# Altium PCB XT short bus with break-away tab ( 5.2 X 4.2 inches).PCBDOC
Units mil, origin at the board's own origin, x right, y up, seen from the top; angles counter-clockwise.
Board outline 5200 x 4950 mil, 10 copper layers (TopLayer, MidLayer1, MidLayer2, MidLayer3, MidLayer4, MidLayer5, MidLayer6, MidLayer7, MidLayer8, BottomLayer); 1 components, 0 nets, 85 pads, 0 vias.
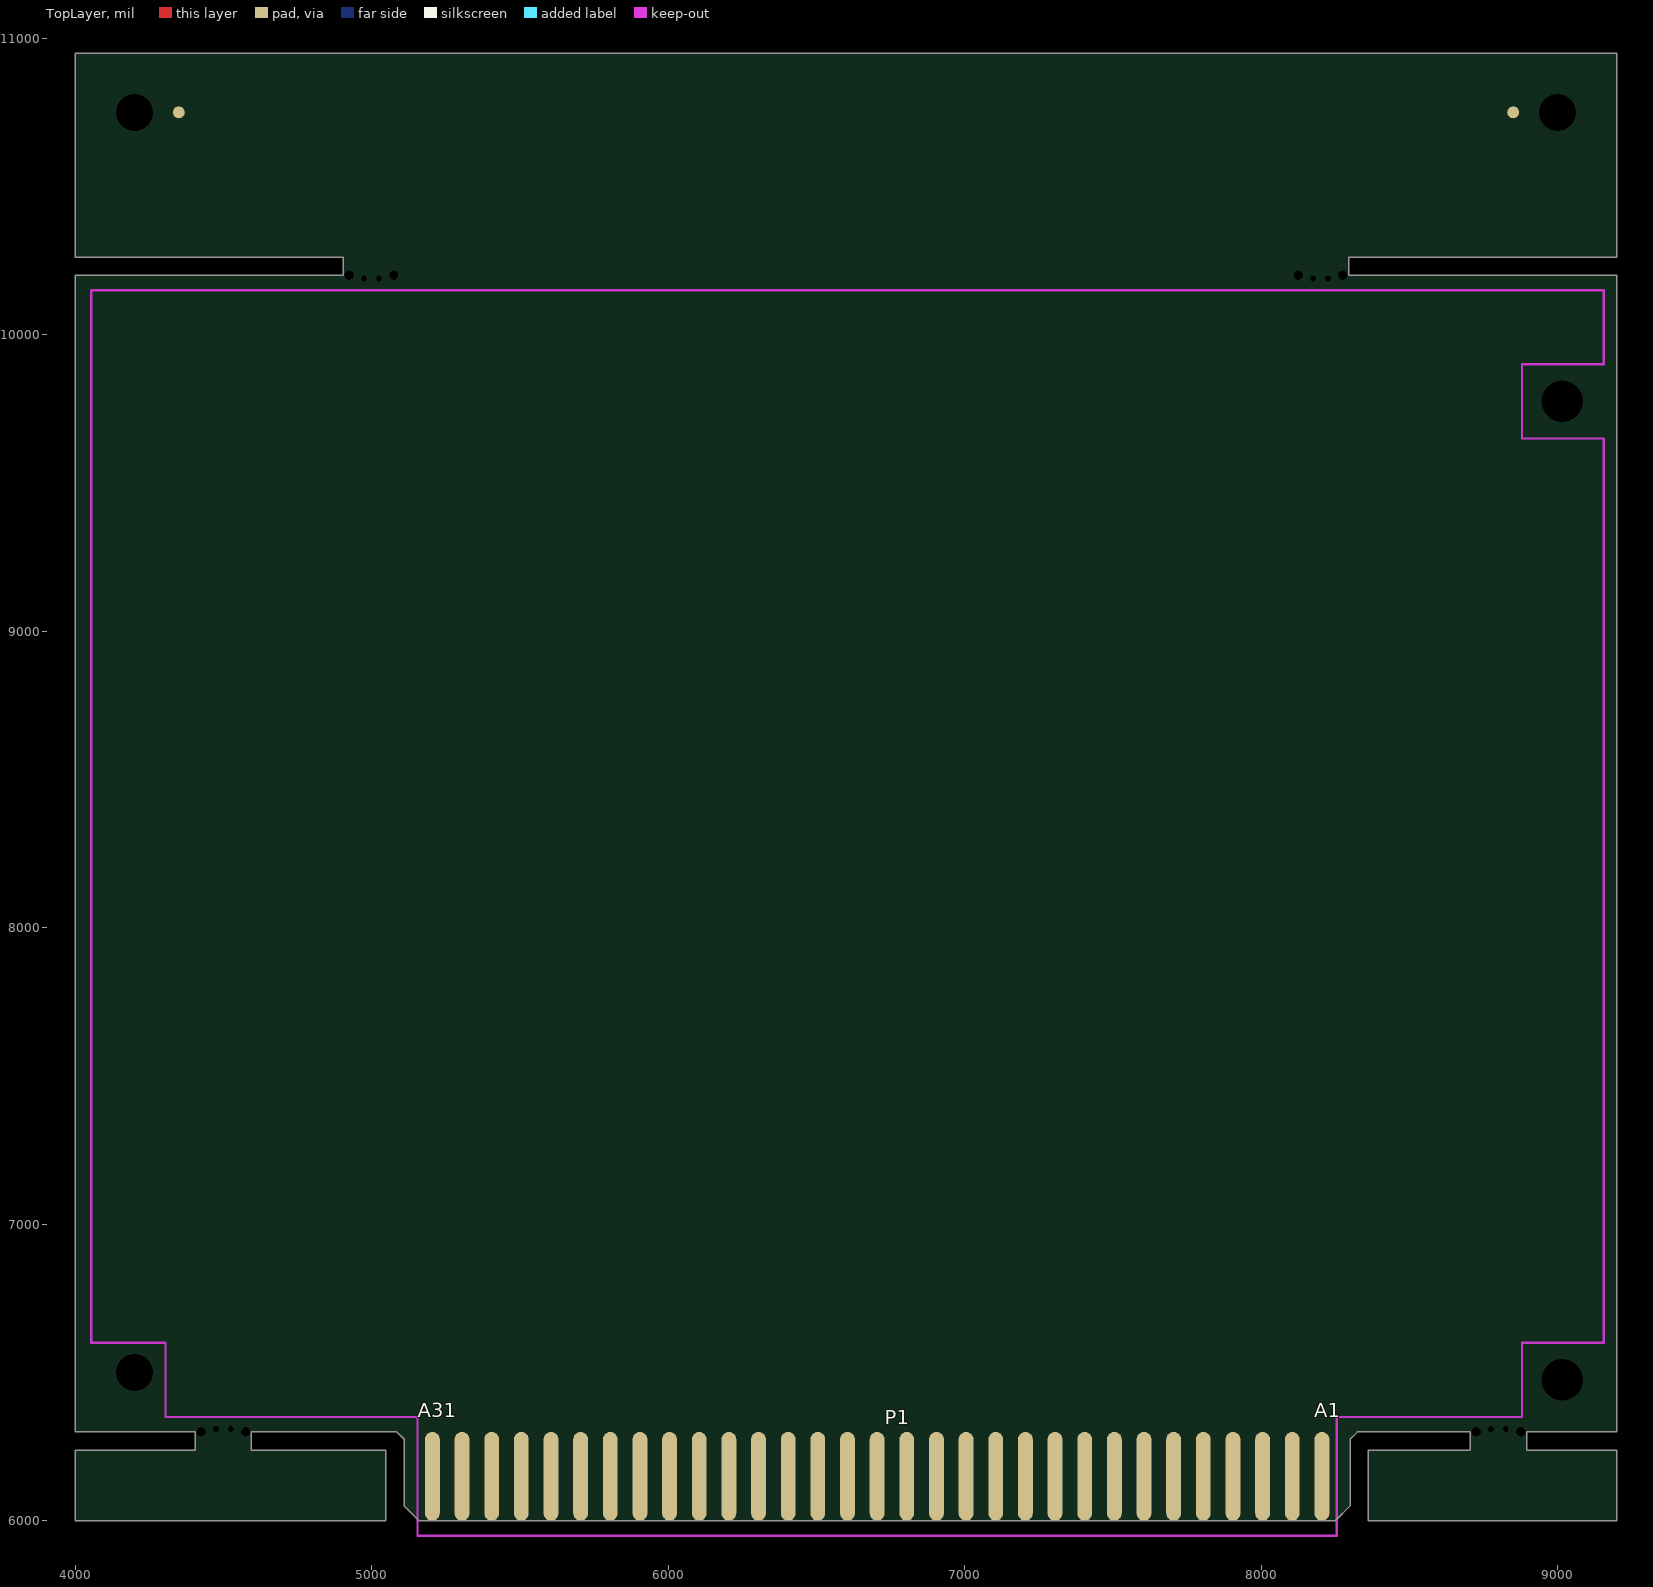
[diagram p0: TopLayer view]
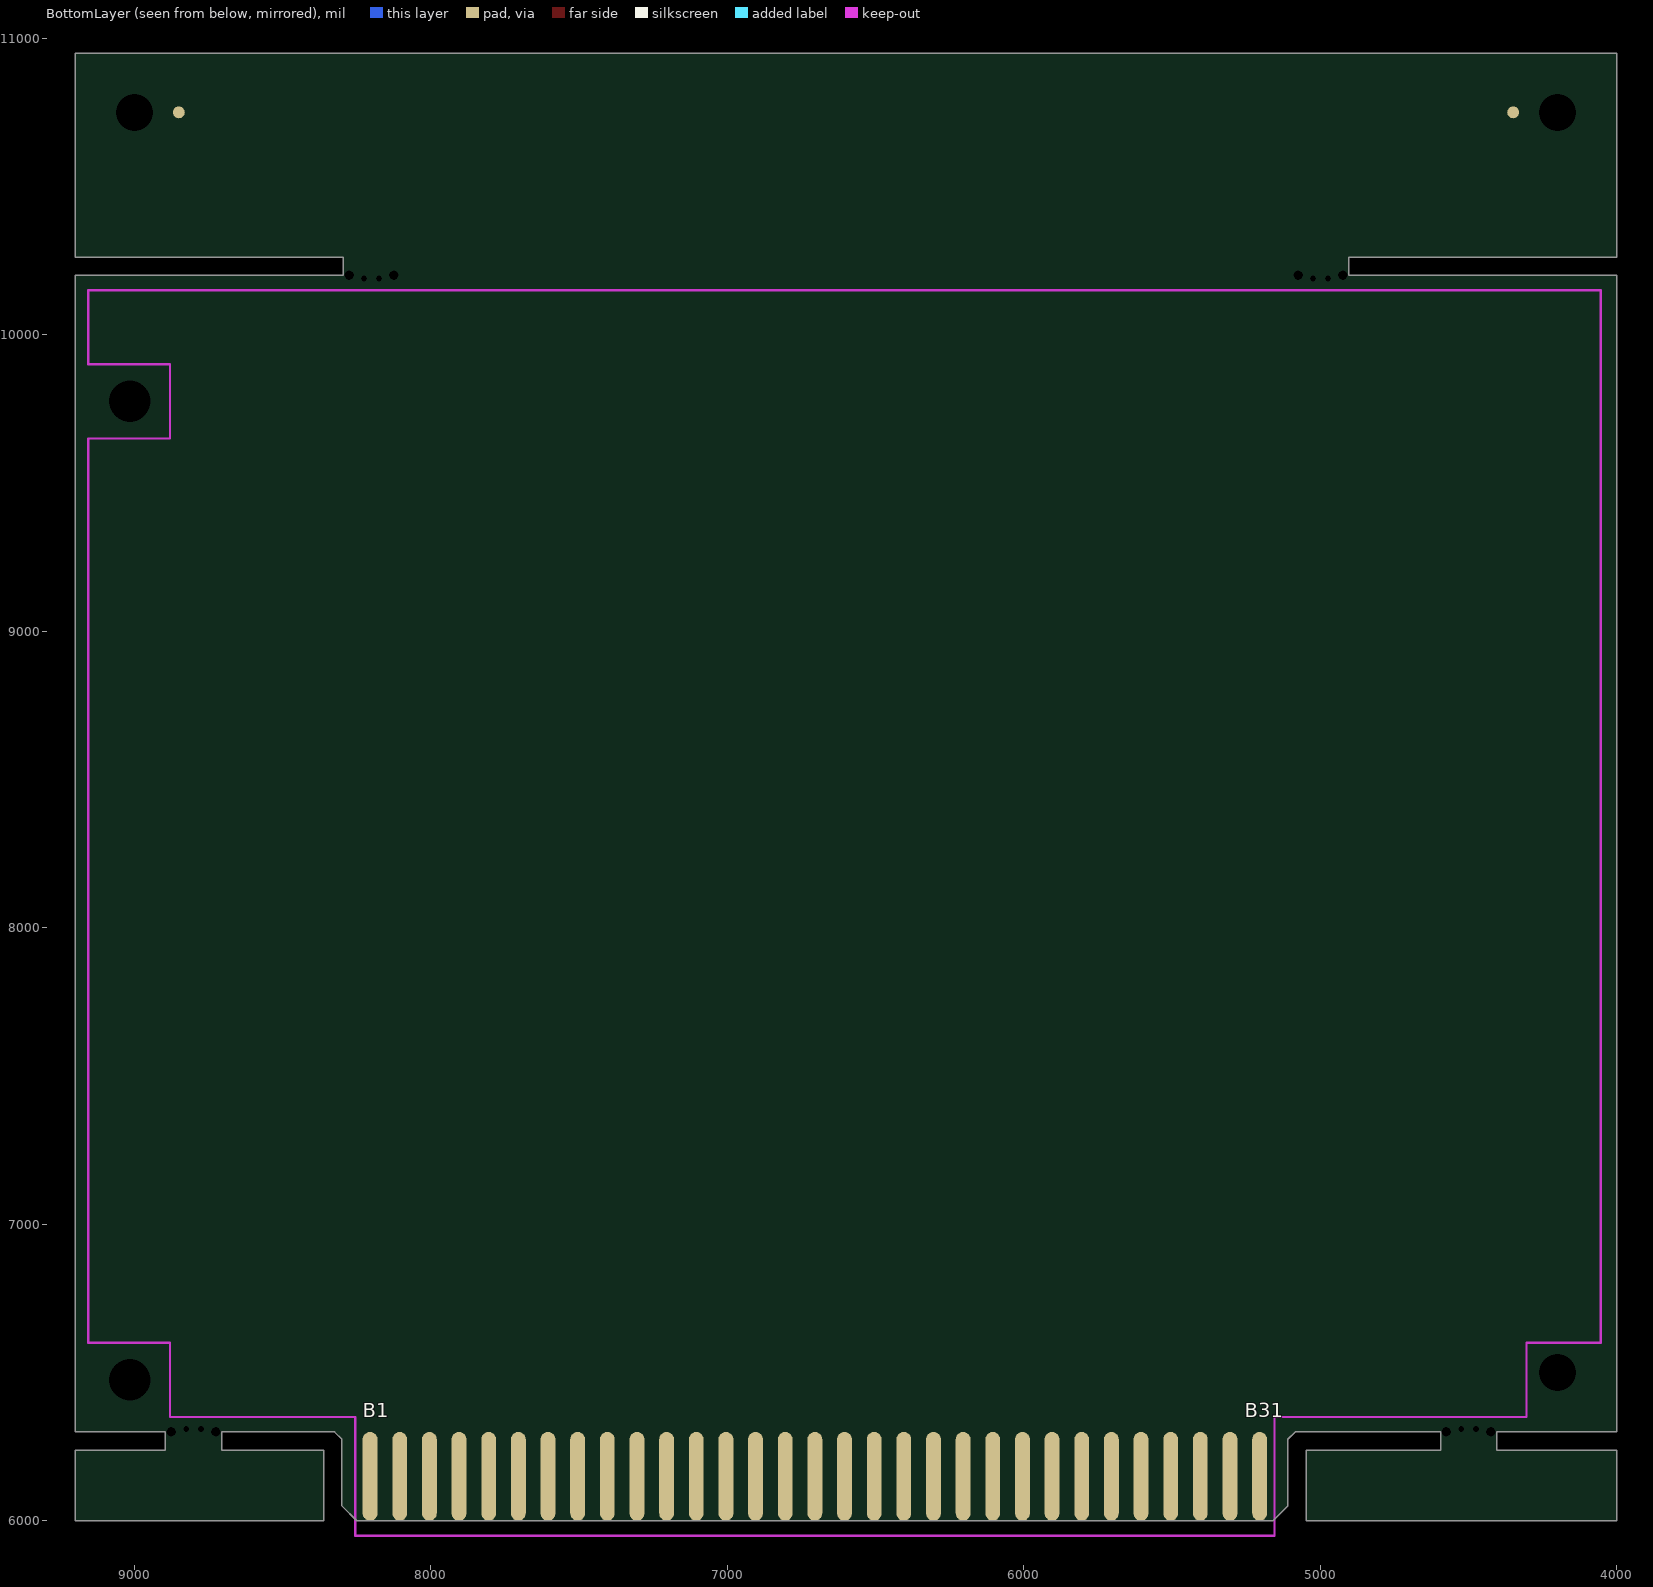
[diagram p1: BottomLayer view, seen from below]
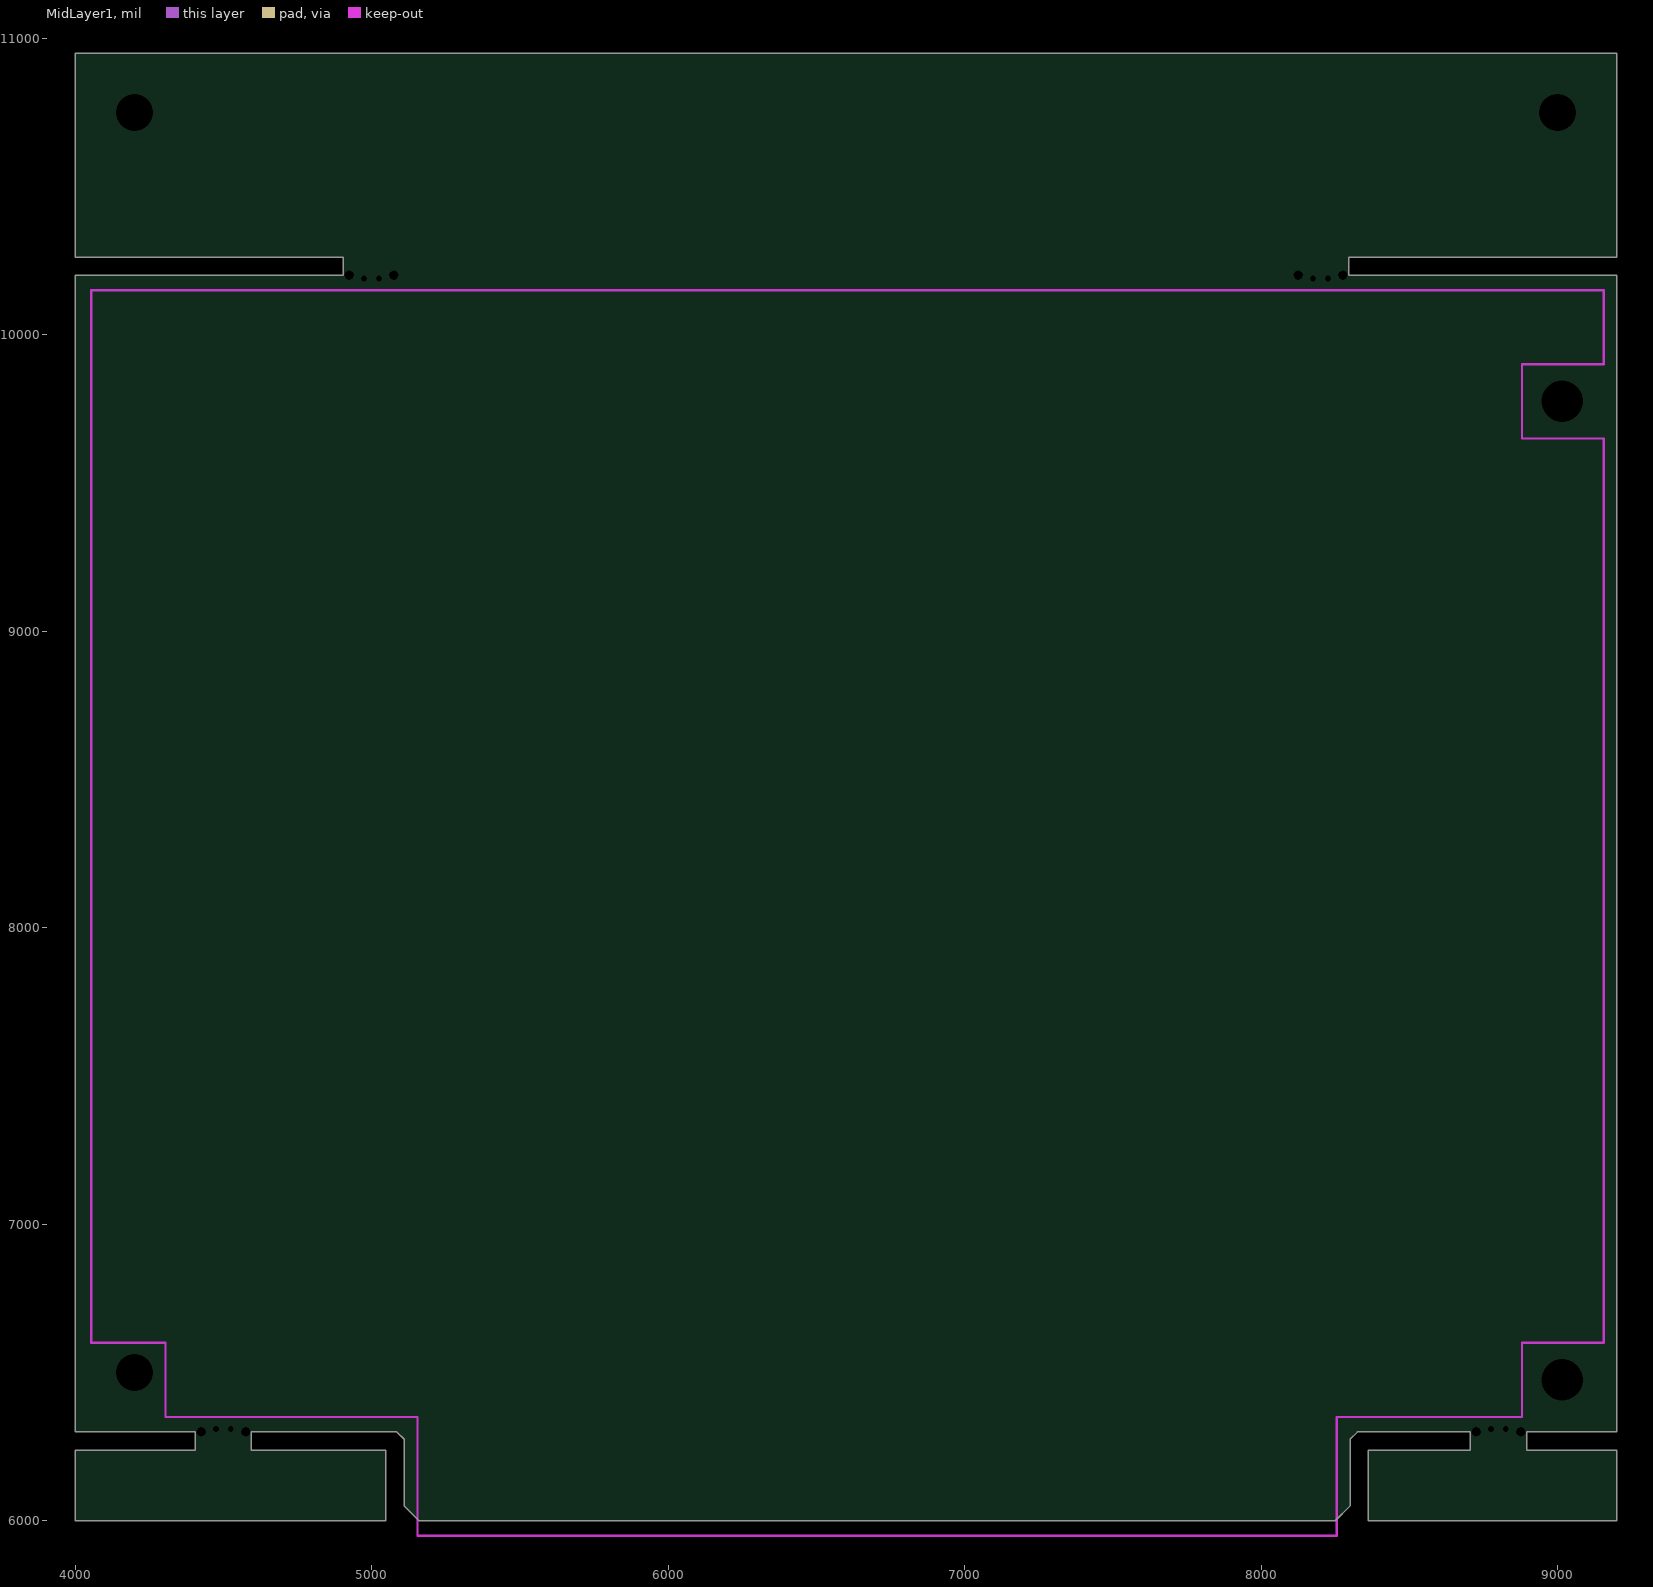
[diagram p2: MidLayer1]
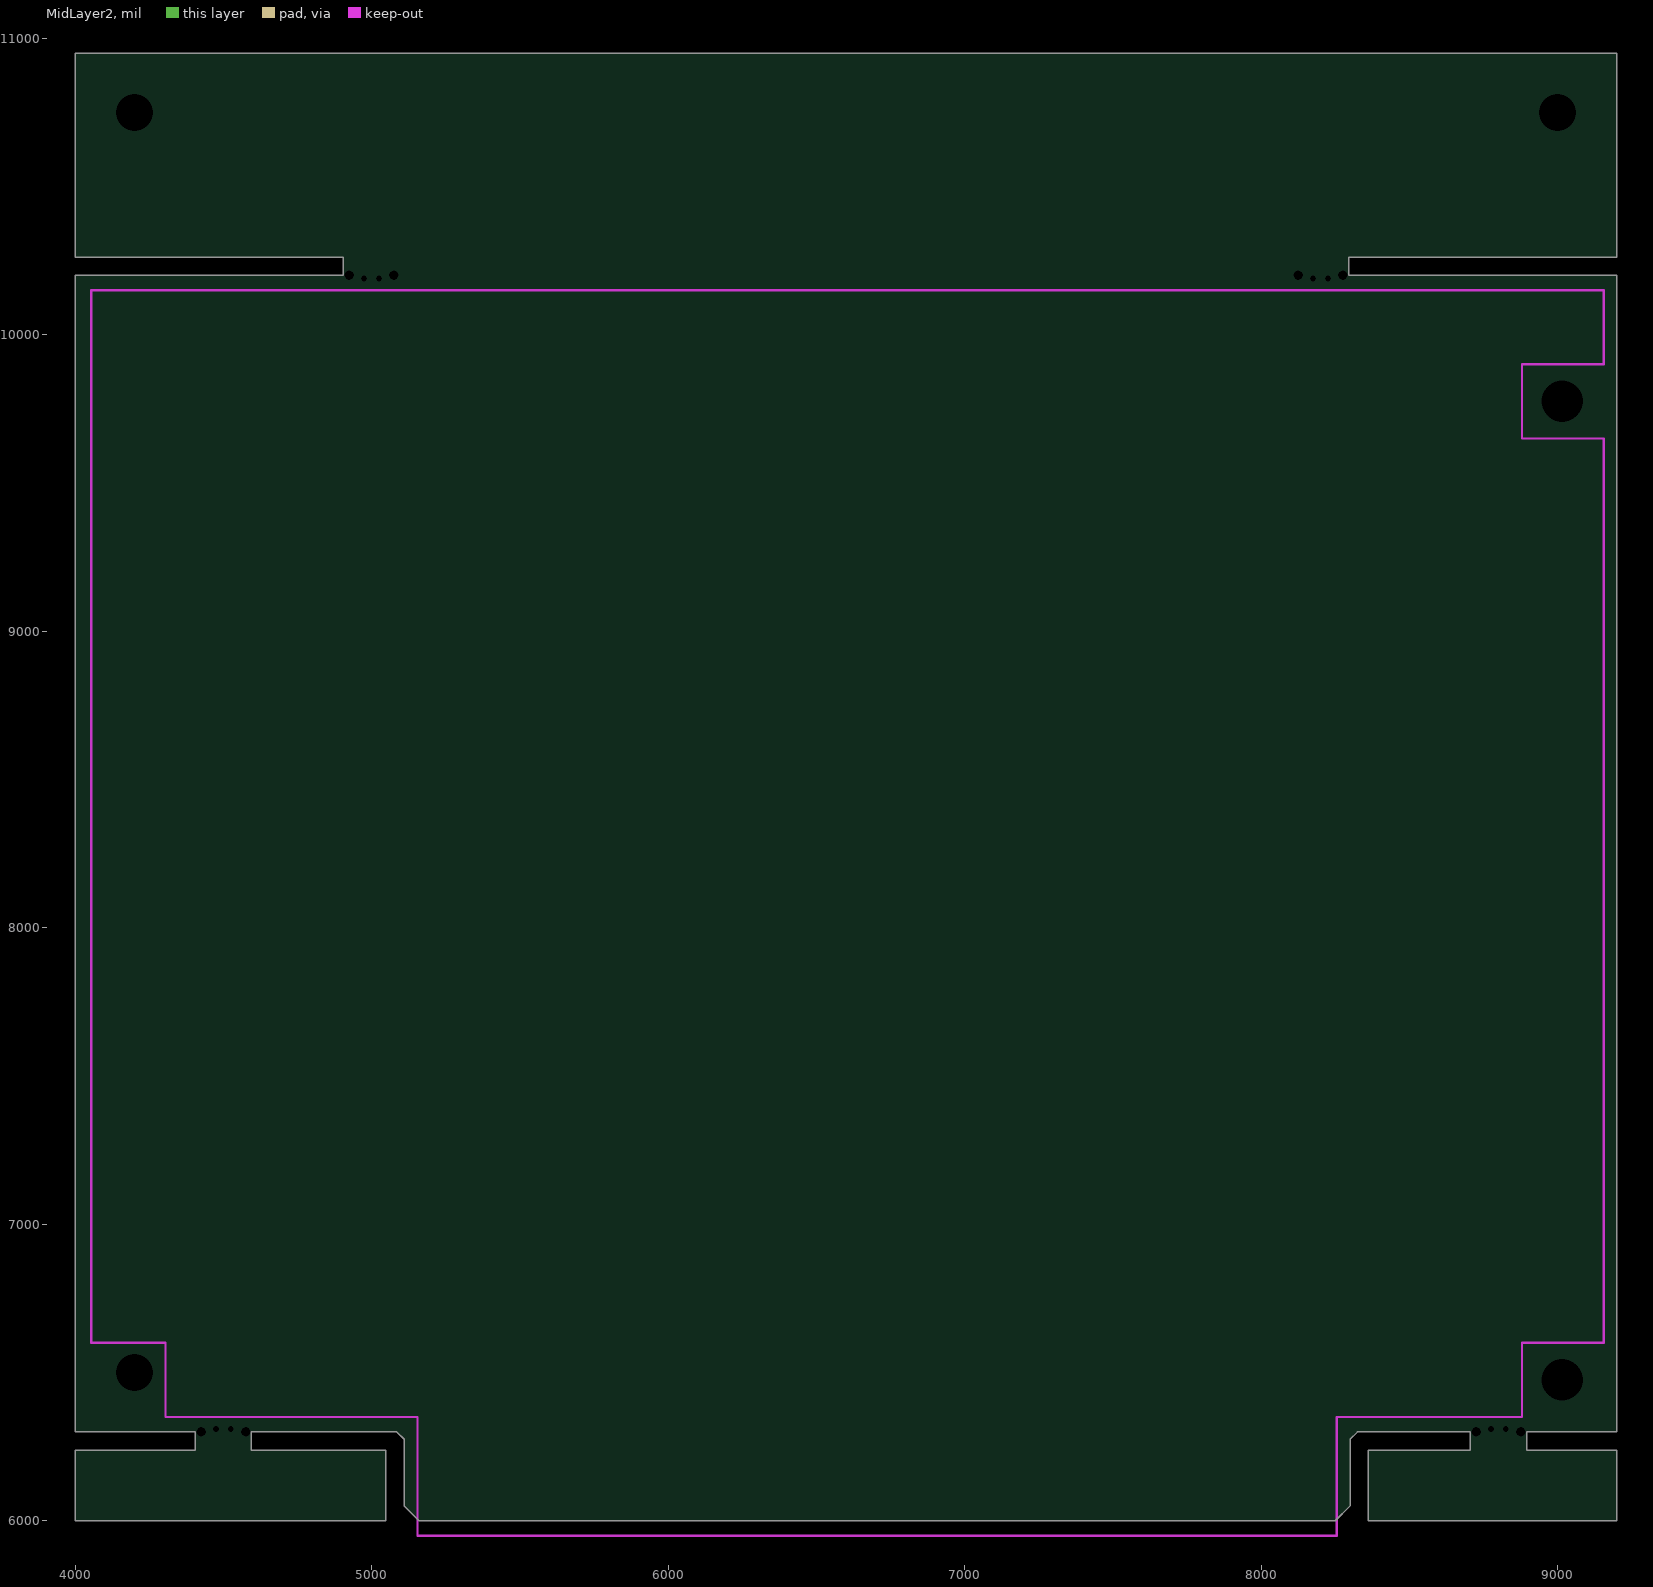
[diagram p3: MidLayer2]
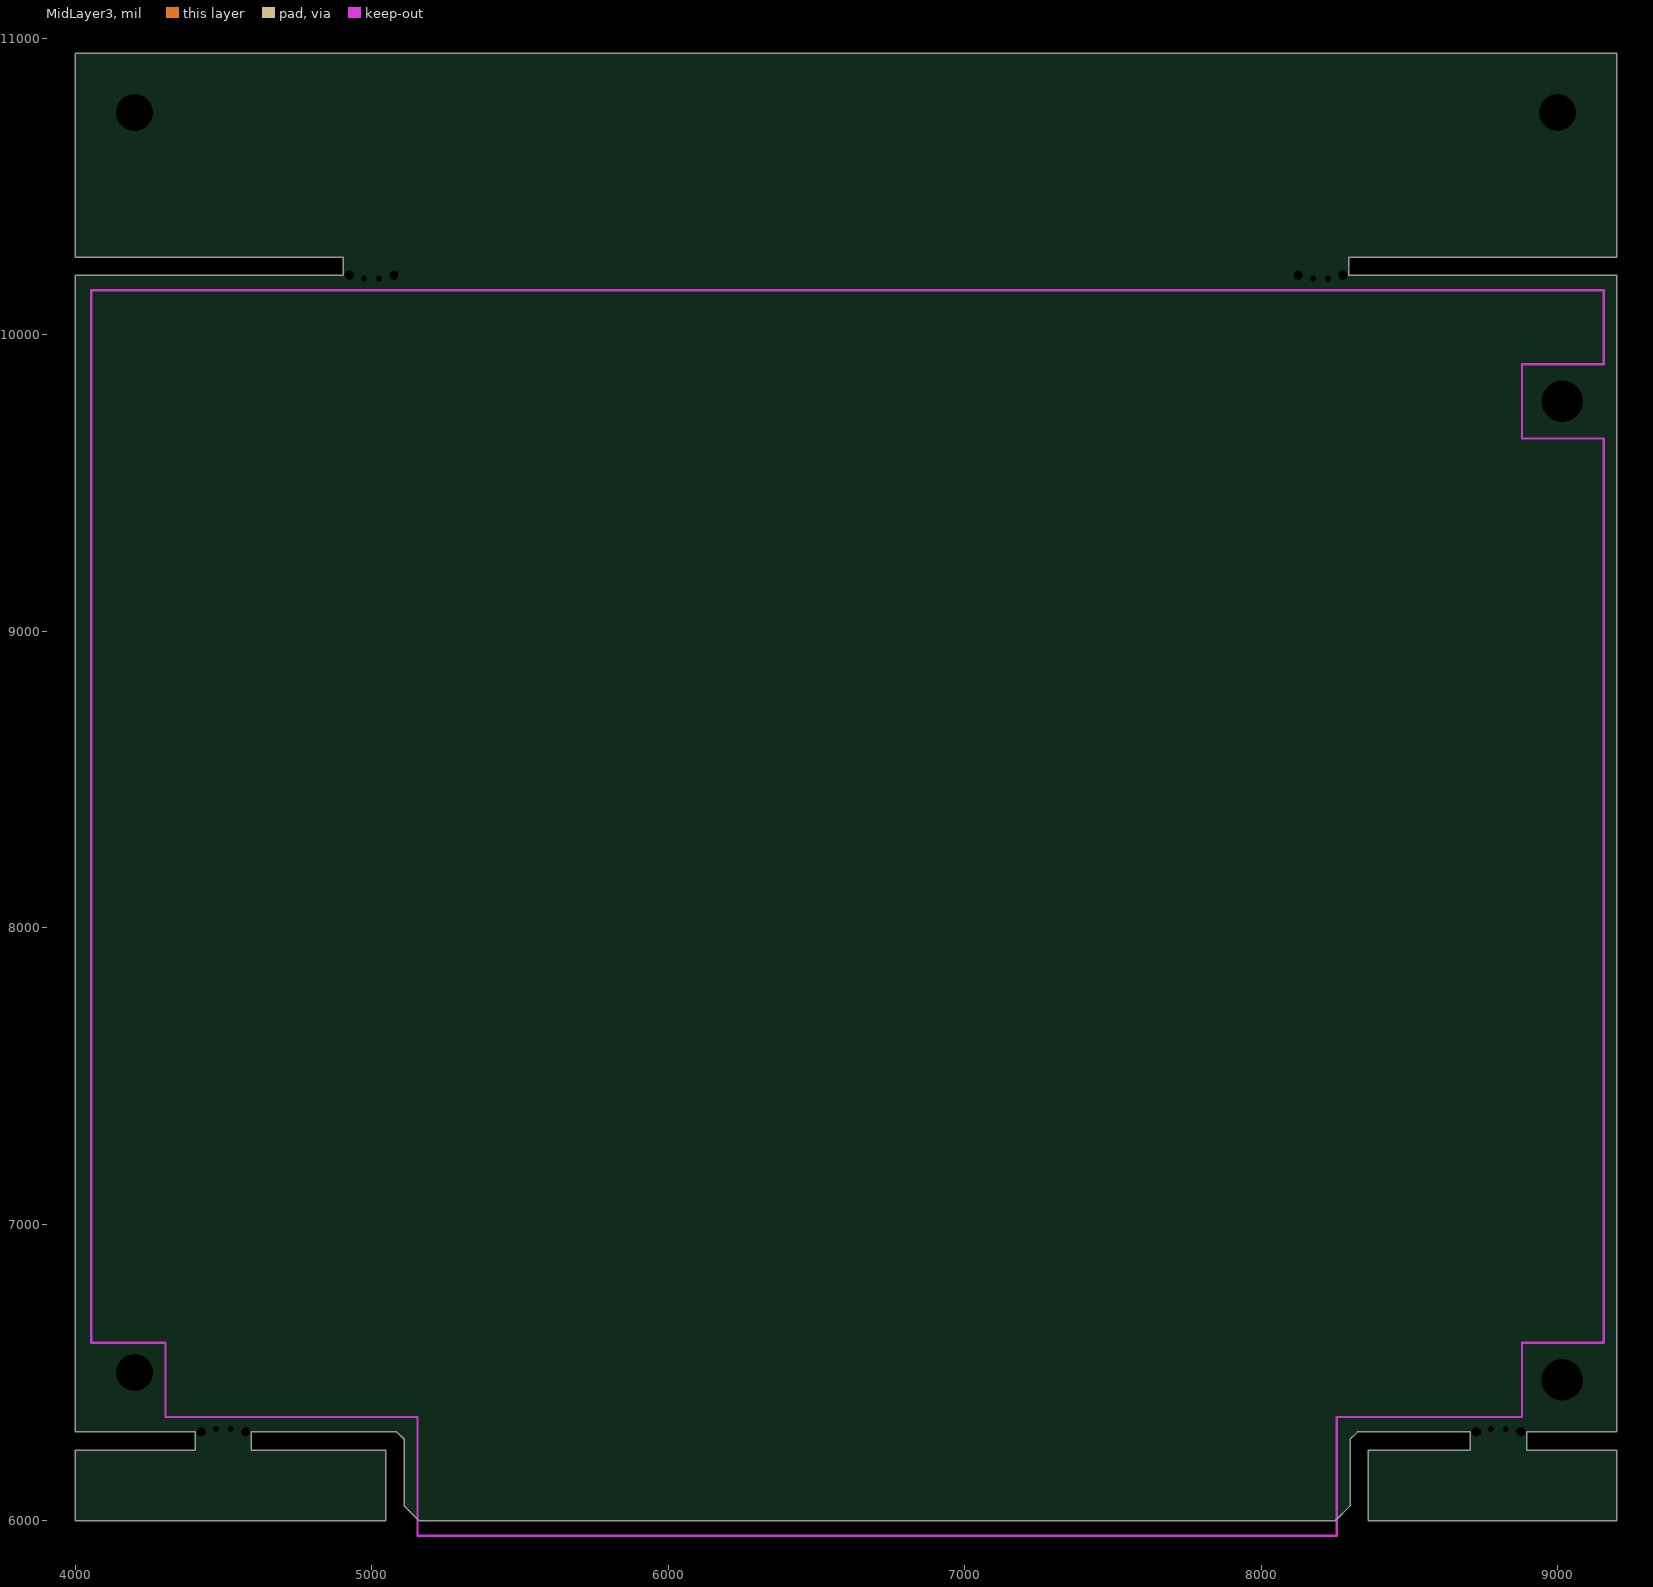
[diagram p4: MidLayer3]
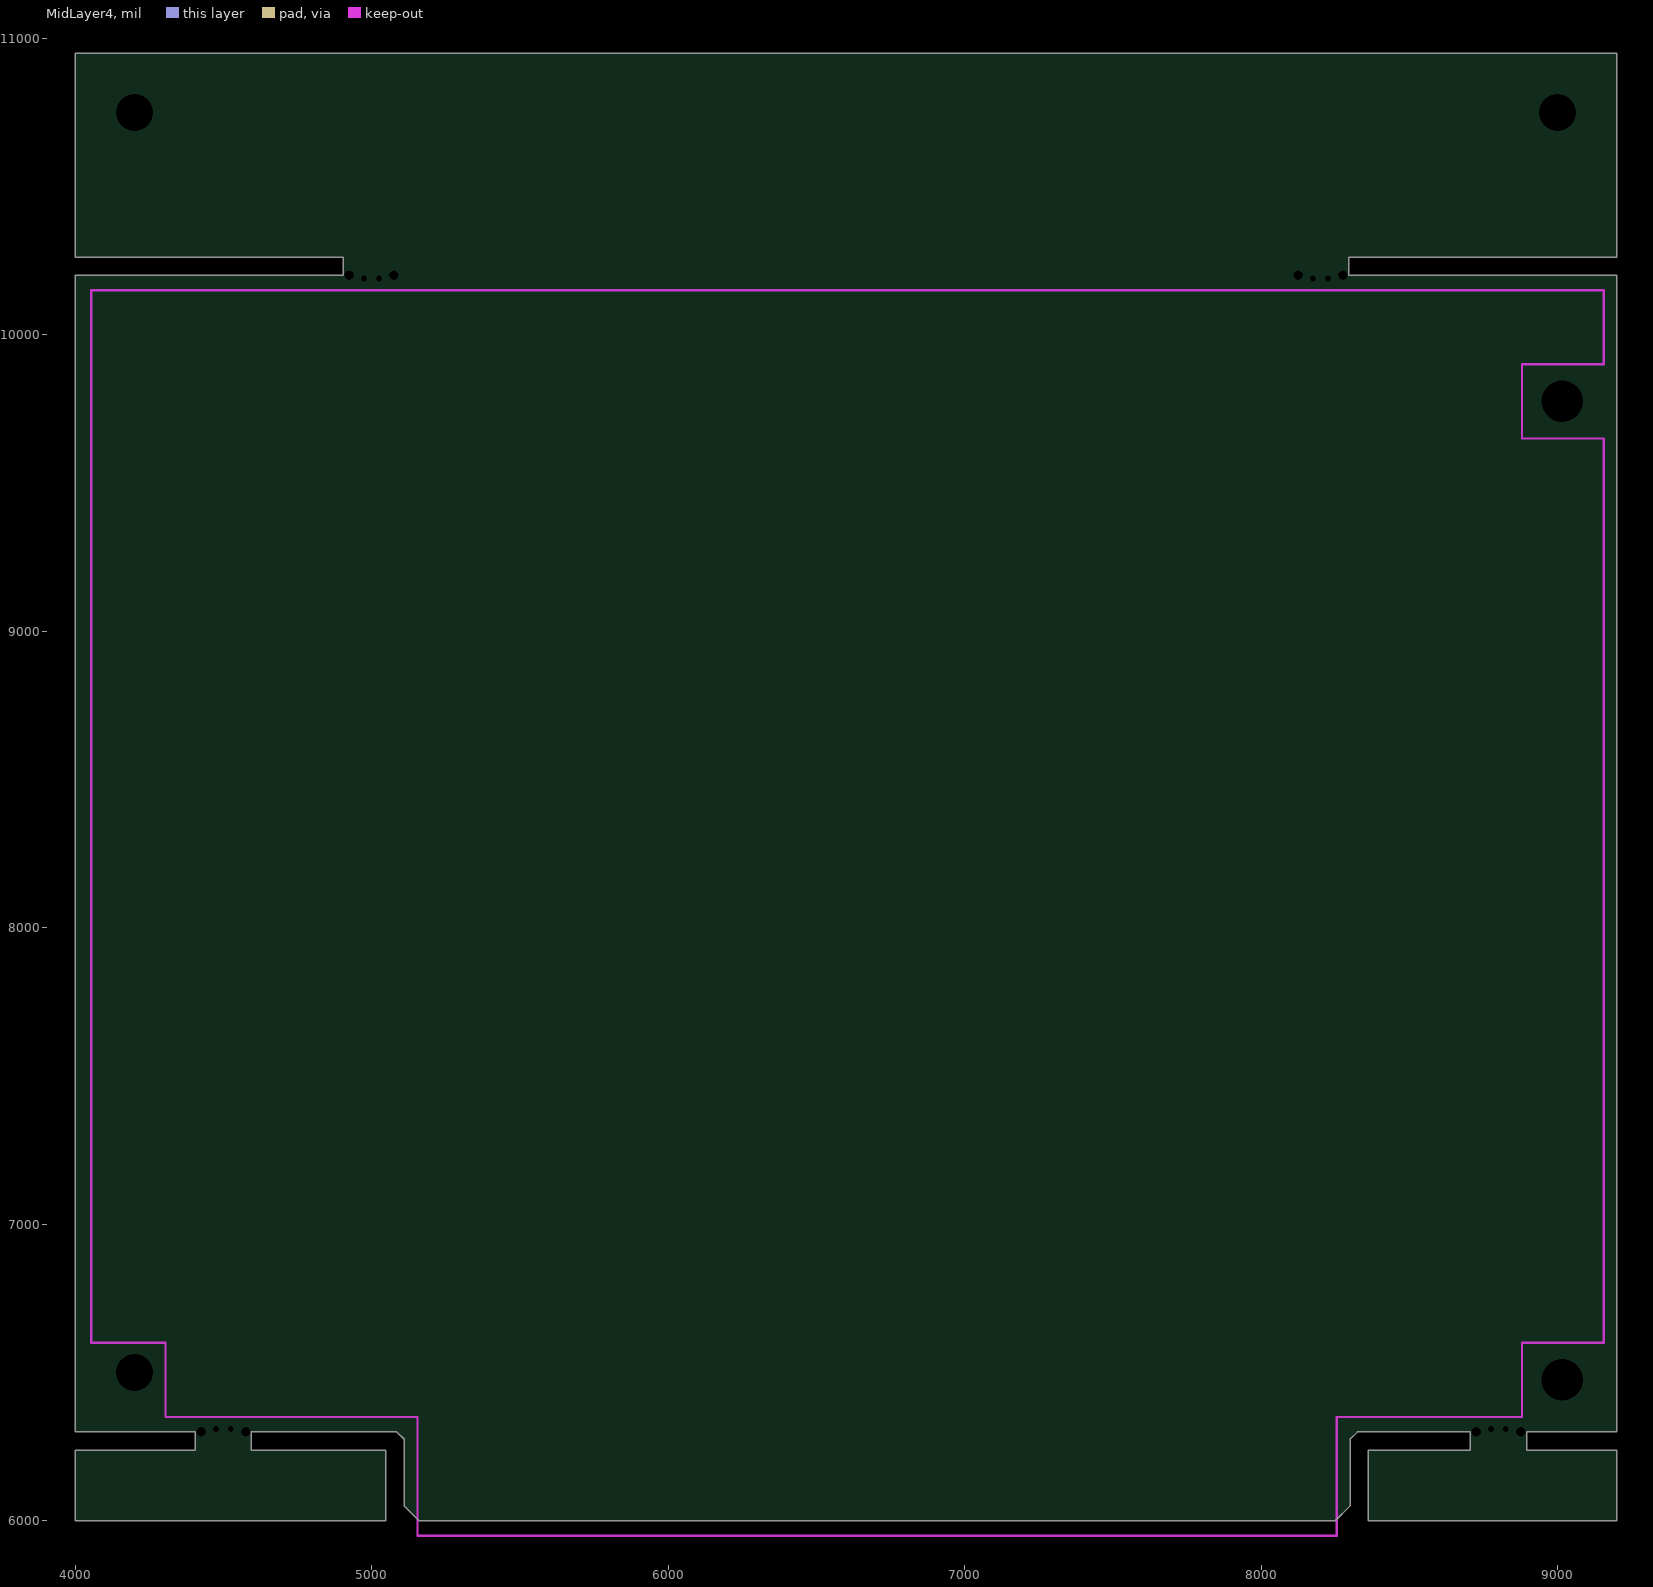
[diagram p5: MidLayer4]
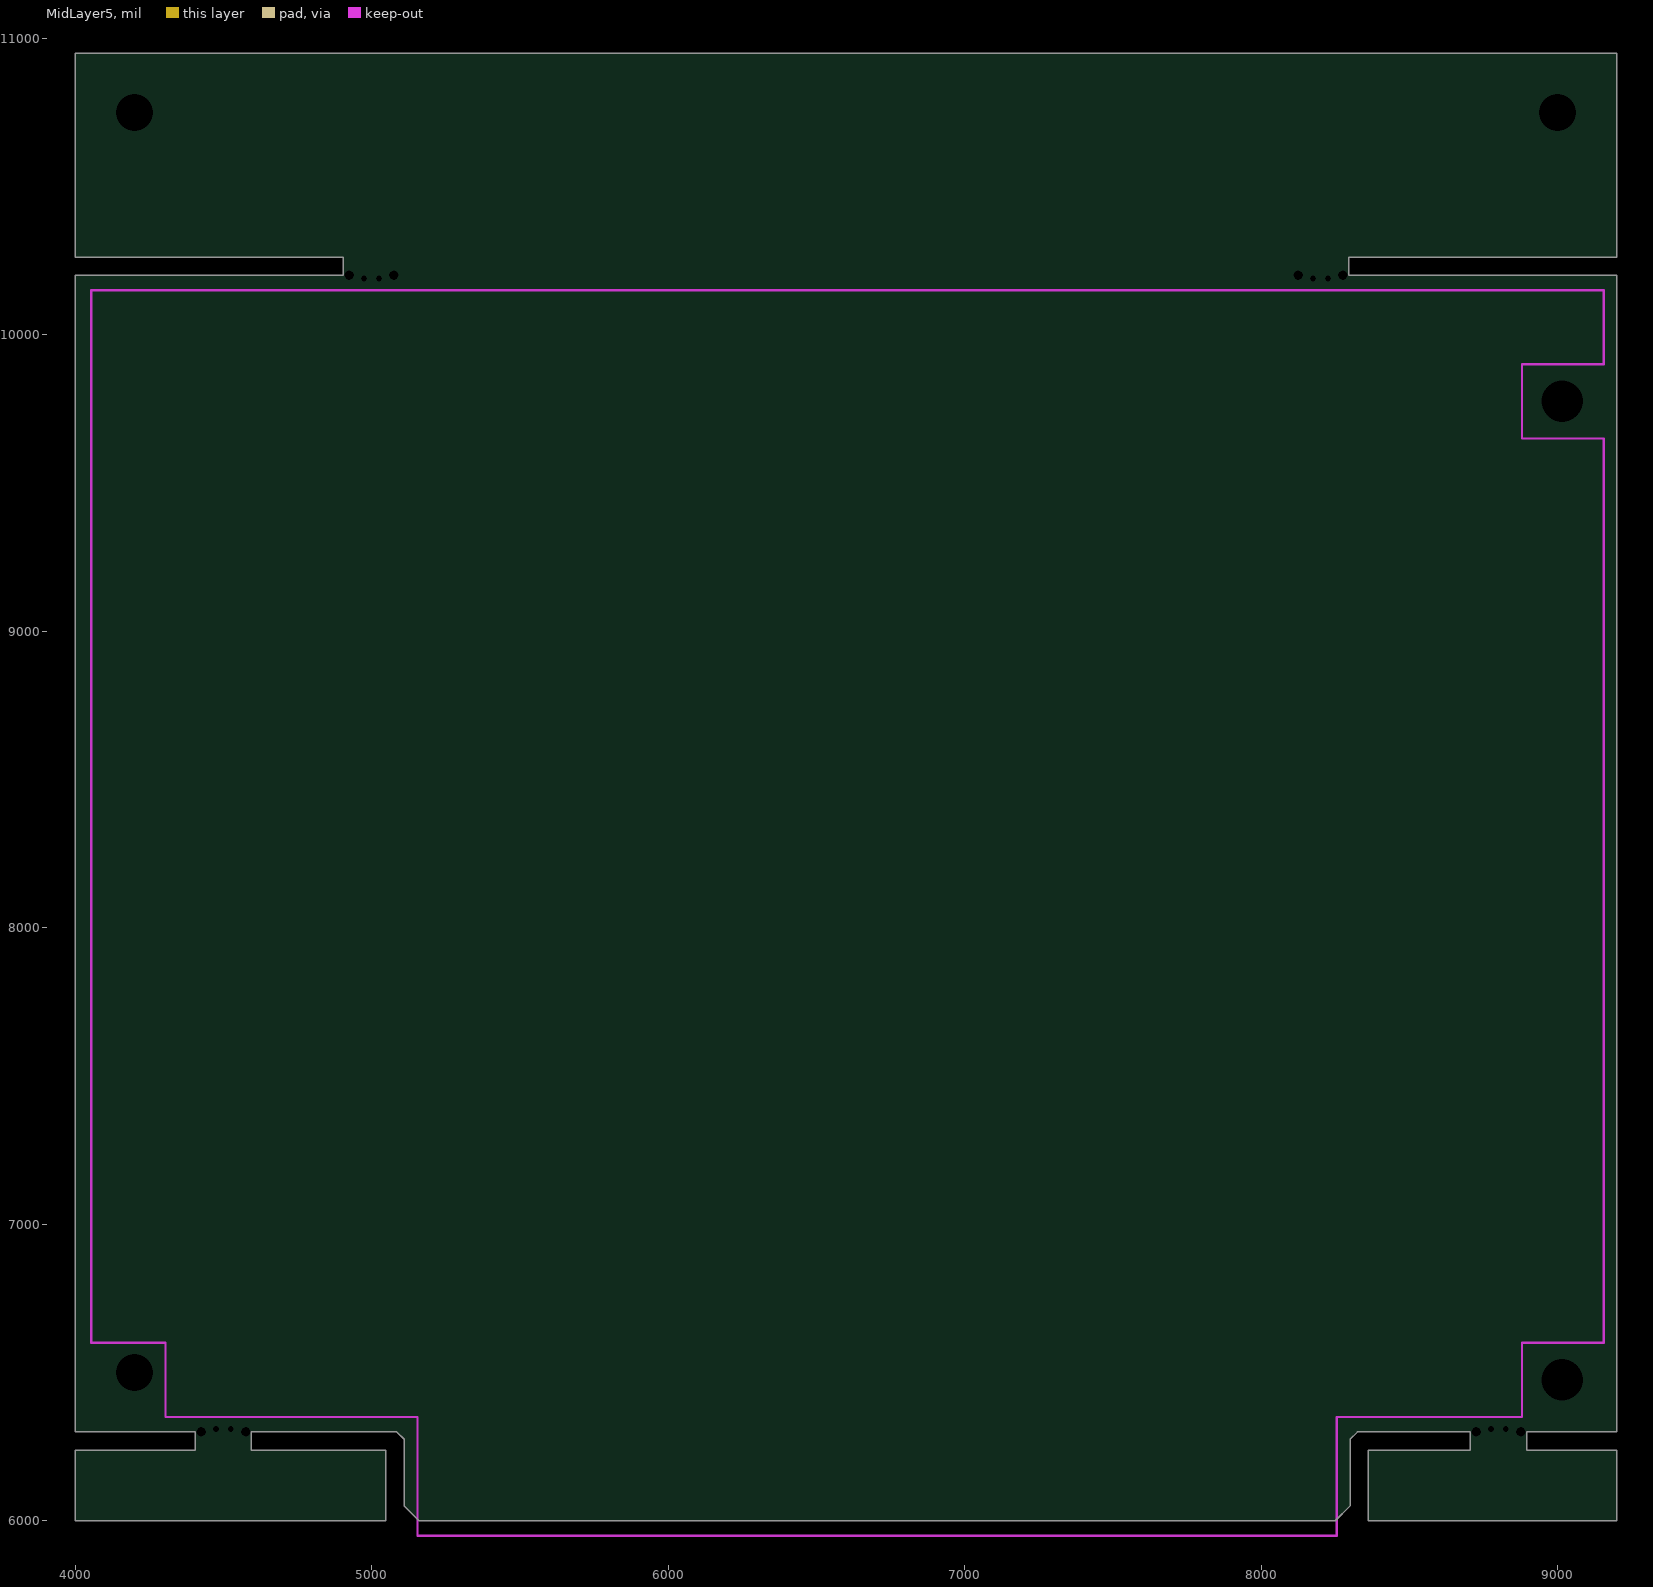
[diagram p6: MidLayer5]
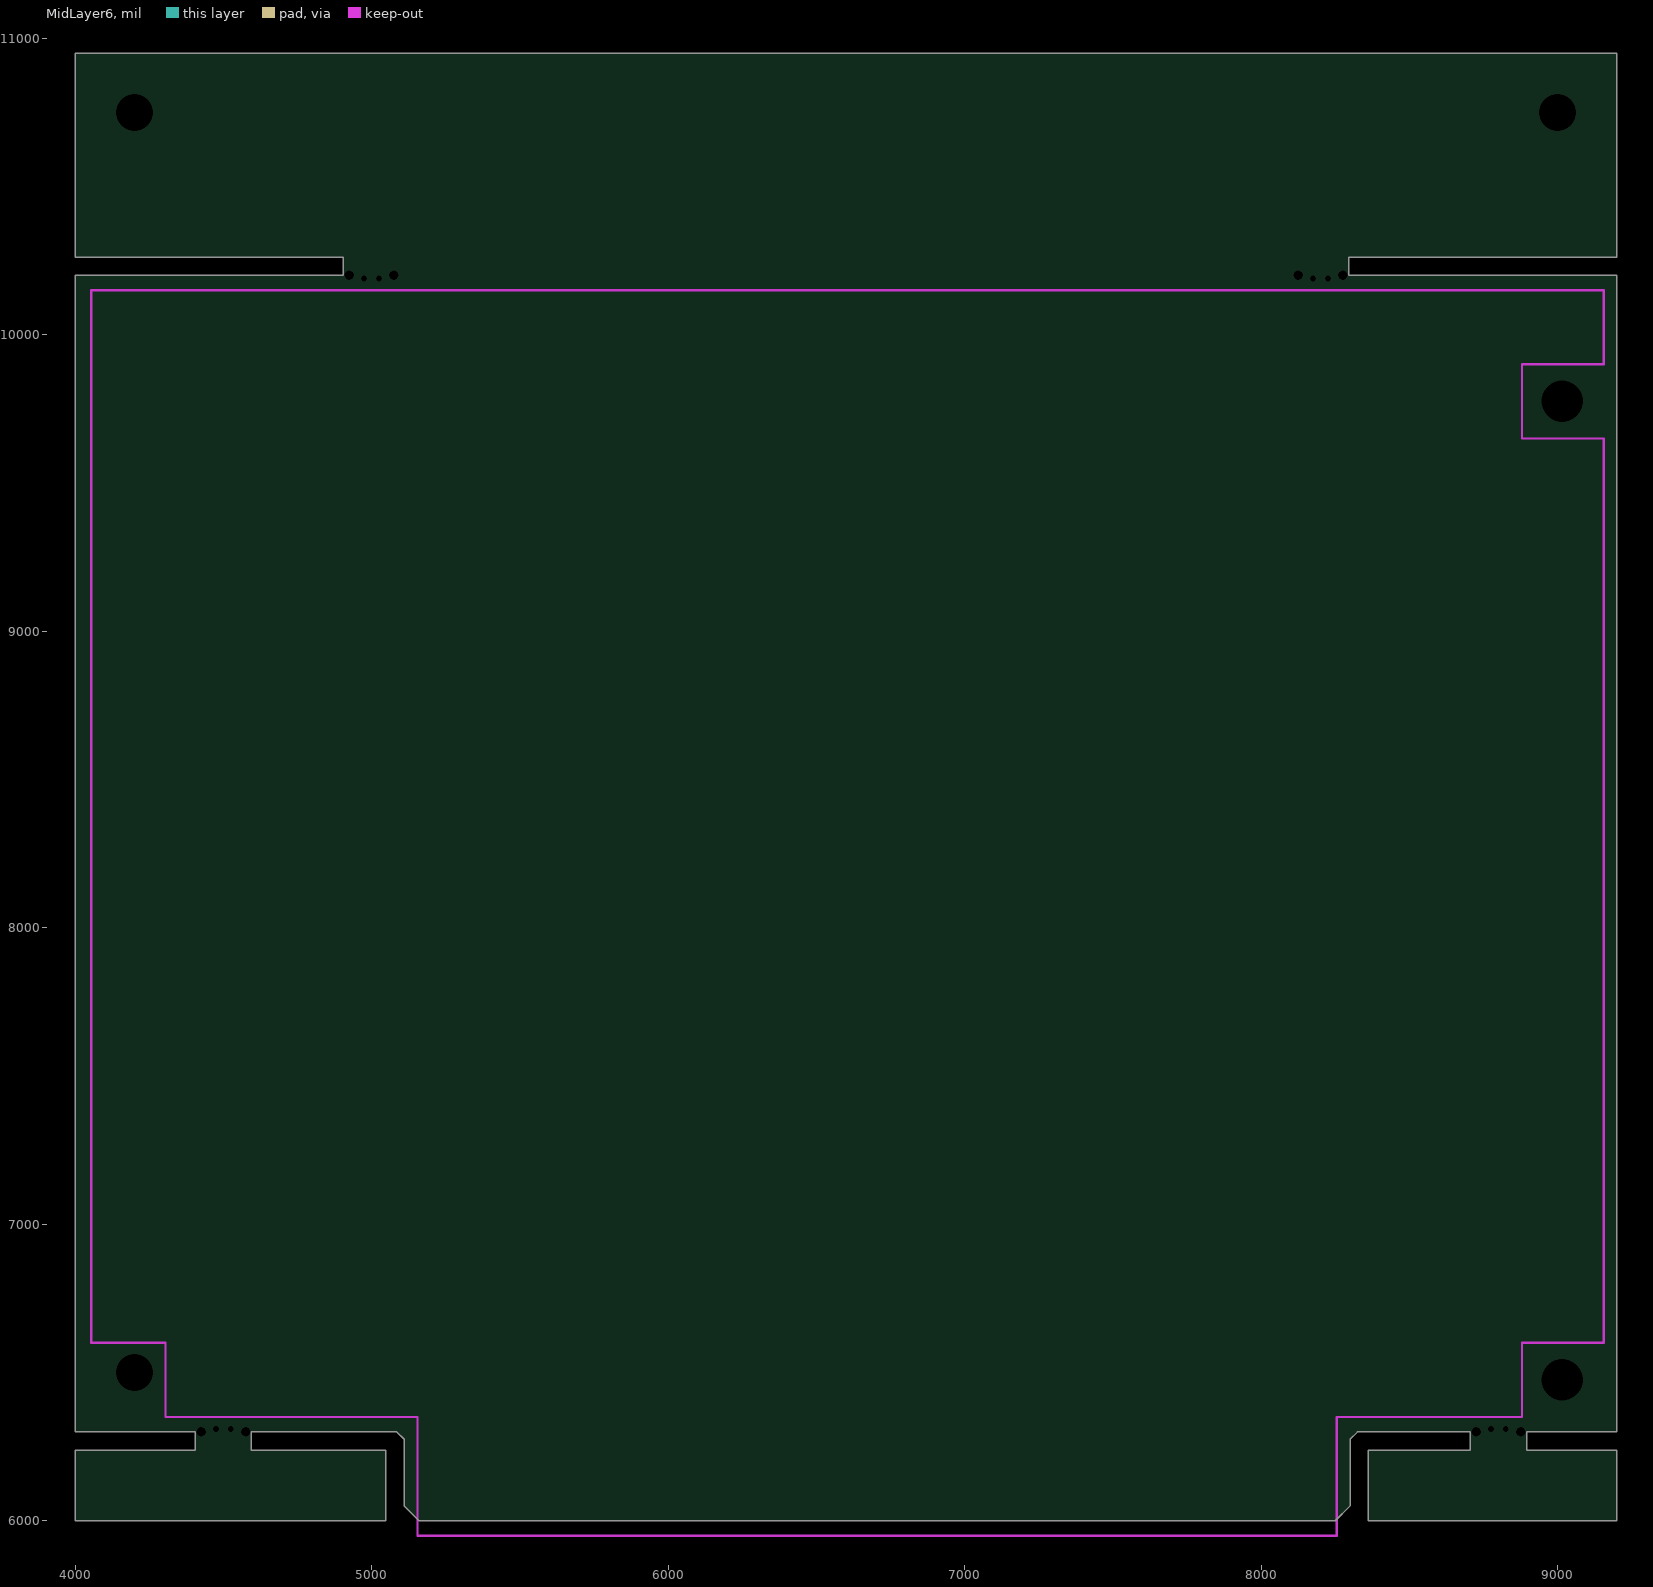
[diagram p7: MidLayer6]
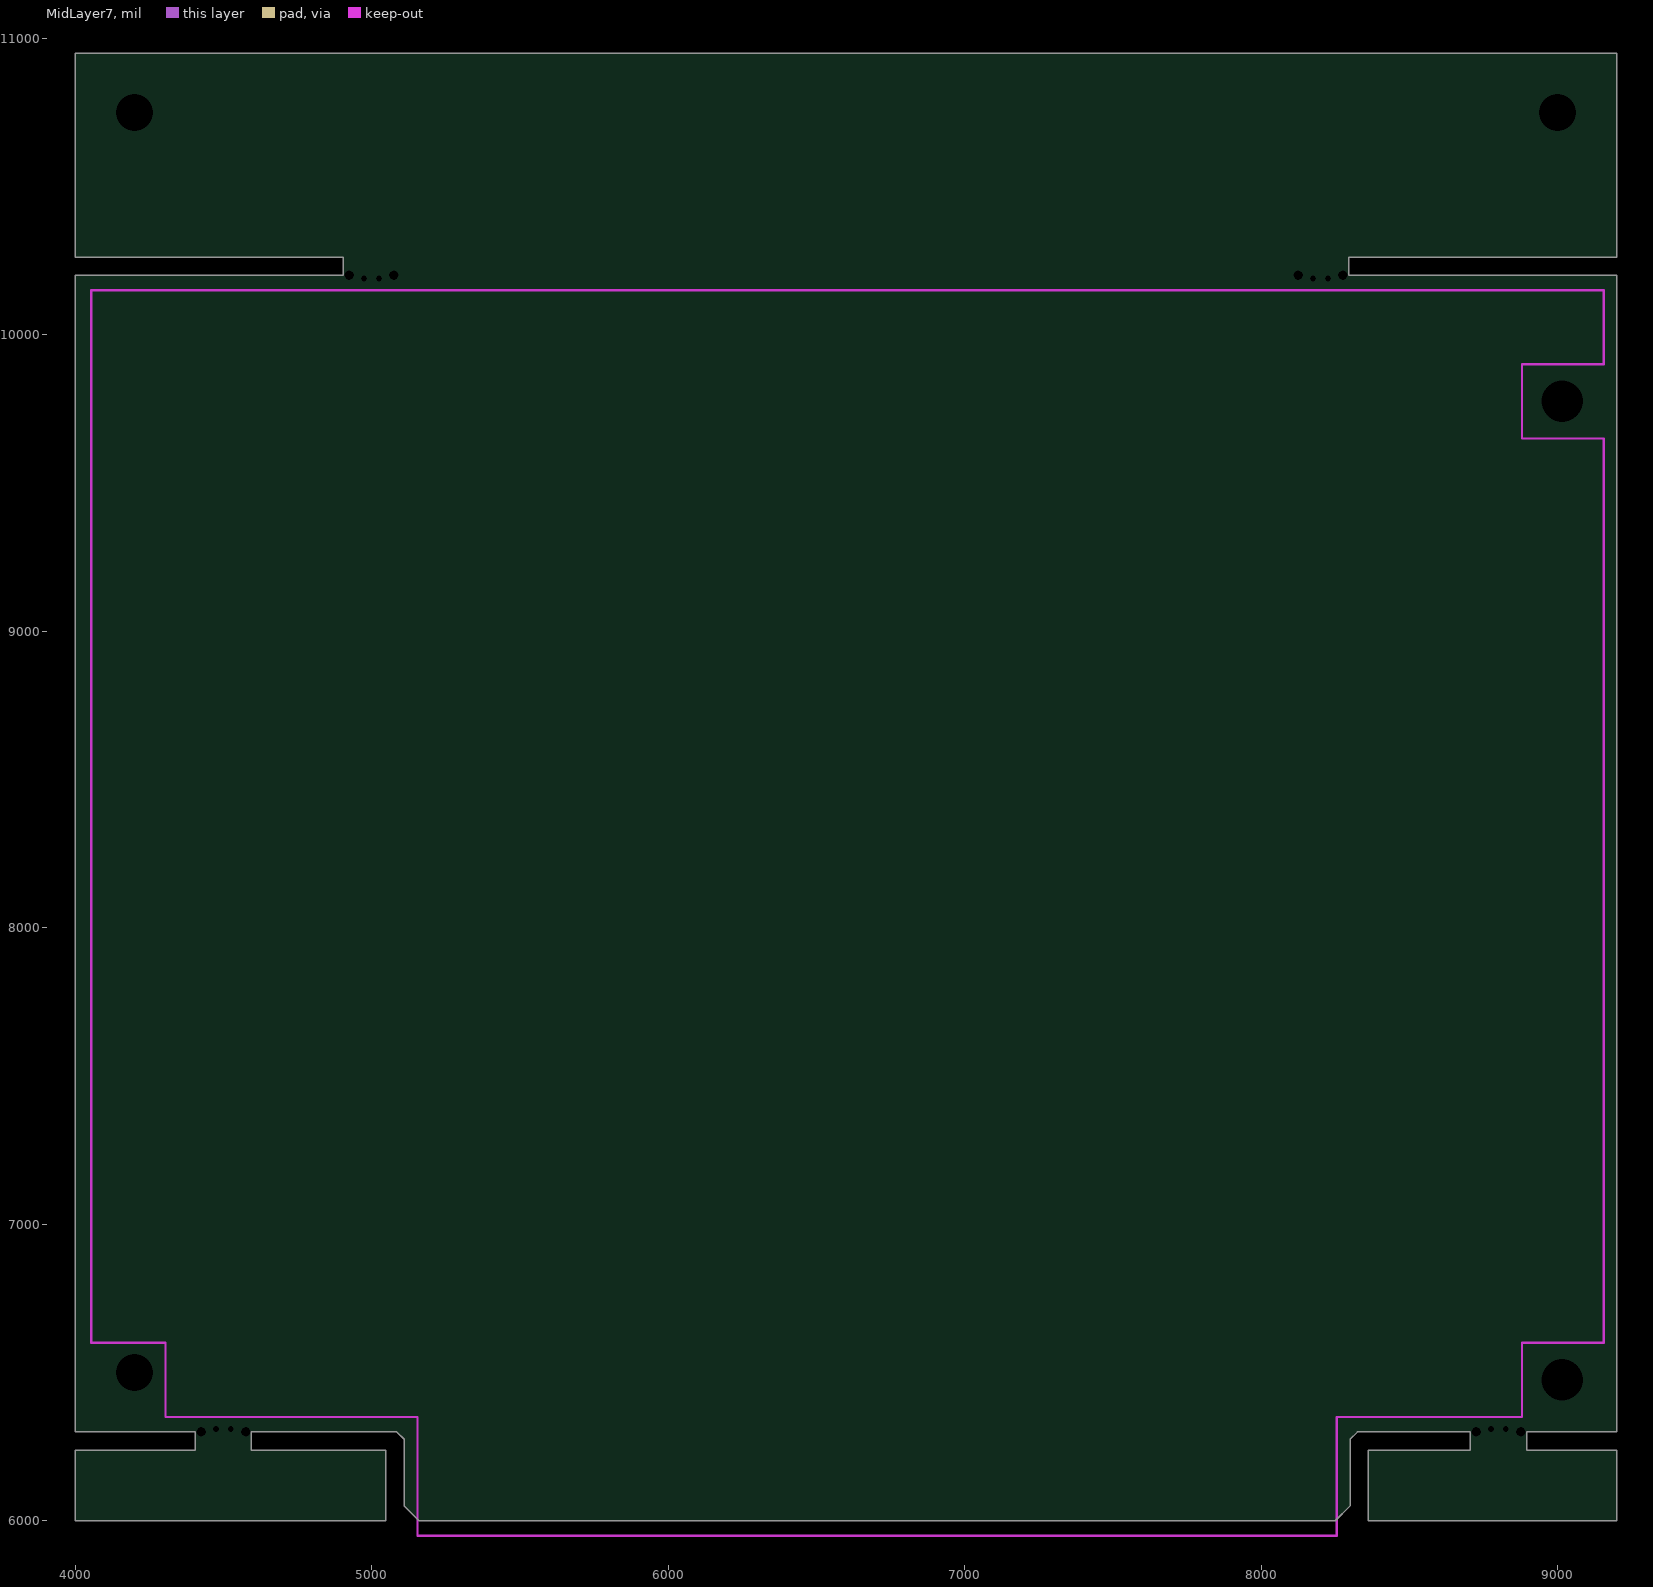
[diagram p8: MidLayer7]
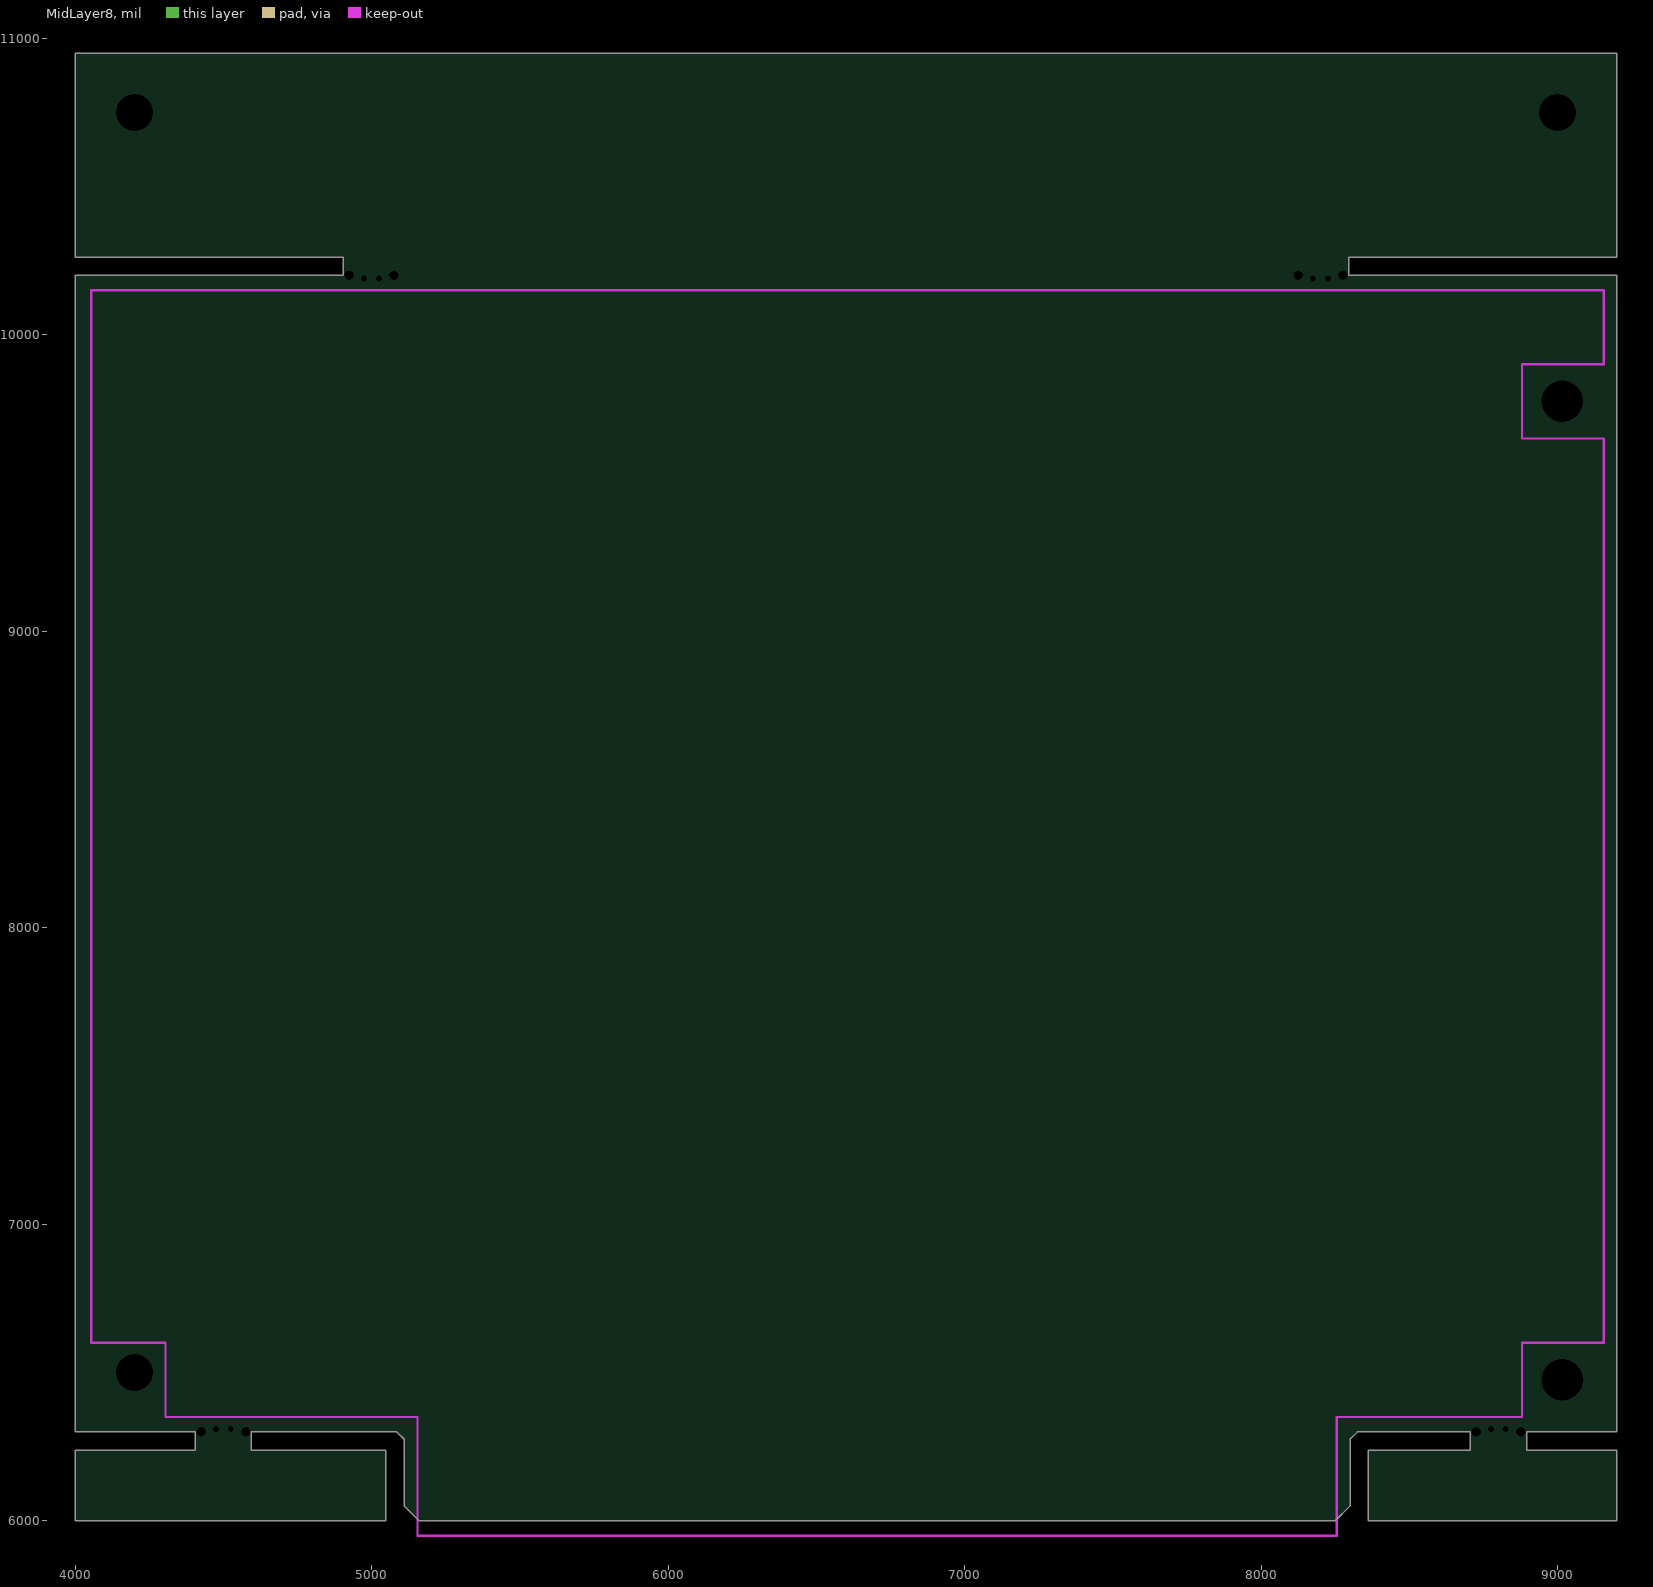
[diagram p9: MidLayer8]

## Layer stack, top to bottom
TopSolder: solder mask 0.4, Solder Resist, Dk 3.5
TopLayer: signal copper 1.4
Dielectric1: core 12.6, FR-4, Dk 4.8
MidLayer1: signal copper 1.4
Dielectric2: prepreg 12.6, FR-4, Dk 4.8
MidLayer2: signal copper 1.4
Dielectric3: core 12.6, FR-4, Dk 4.8
MidLayer3: signal copper 1.4
Dielectric4: prepreg 12.6, FR-4, Dk 4.8
MidLayer4: signal copper 1.4
Dielectric5: core 12.6, FR-4, Dk 4.8
MidLayer5: signal copper 1.4
Dielectric6: prepreg 12.6, FR-4, Dk 4.8
MidLayer6: signal copper 1.4
Dielectric7: core 12.6, FR-4, Dk 4.8
MidLayer7: signal copper 1.4
Dielectric8: prepreg 12.6, FR-4, Dk 4.8
MidLayer8: signal copper 1.4
Dielectric9: core 12.6, FR-4, Dk 4.8
BottomLayer: signal copper 1.4
BottomSolder: solder mask 0.4, Solder Resist, Dk 3.5

## Board outline
4000,6000 5048,6000 5048,6238 4595,6238 4595,6300 5085,6300 5110,6275 5110,6050 5160,6000 8250,6000 8300,6050 8300,6275 8325,6300 8705,6300 8705,6238 8362,6238 8362,6000 9200,6000 9200,6238 8895,6238 8895,6300 9200,6300 9200,10200 8295,10200 8295,10262 9200,10262 9200,10950 4000,10950 4000,10262 4905,10262 4905,10200 4000,10200 4000,6300 4405,6300 4405,6238 4000,6238

## Design rules (kind name [scope] priority, off if disabled: settings)
Clearance [All] p1: gap=10
FabricationTestPointUsage TestPointUsage [All] p1: valid=0 allowmultiple=FALSE
FabricationTestpoint Testpoint [All] p1: side=3 testpointundercomponent=TRUE minsize=40 maxsize=100 preferedsize=60 minholesize=20 maxholesize=40 preferedholesize=32 testpointgrid=1 allowsidetop=TRUE allowsidebottom=TRUE usegrid=TRUE gridtolerance=0.01
PasteMaskExpansion PasteMaskExpansion_1 [InComponent('P1')] p1: expansion=-150
PasteMaskExpansion [All] p2: expansion=0
PlaneClearance [All] p1: clearance=10
PolygonConnect [All] p1: connectstyle=Relief reliefconductorwidth=10 reliefentries=4 polygonreliefangle="90 Angle" airgapwidth=10
RoutingVias [All] p1: holewidth=28 width=50 viastyle="Through Hole" minholewidth=28 minwidth=50 maxholewidth=28 maxwidth=50
SilkToSolderMaskClearance SilkscreenOverComponentPads [IsPad] p1: minsilkscreentomaskgap=10 clearancetoexposedcopper=TRUE
SolderMaskExpansion SolderMaskExpansion_1 [HasPad('Free-20')] p1: expansion=20
SolderMaskExpansion [HasPad('Free-19')] p2: expansion=20
SolderMaskExpansion SolderMaskExpansion_2 [All] p3: expansion=2
Width [All] p1: maxlimit=10 minlimit=10 preferedwidth=10
25 further rules are at their usual default settings.

## Components (designator, comment, footprint, x,y, rotation, side; value= is the part's Value field where it differs from the comment)
P1 "ECN-IBMXT" ECN-IBMXT 8205,6150 r0 top locked

## Footprints (in the part's own frame and the unit in brackets; to place one, negate y for a bottom-side part, rotate by r counter-clockwise, add the part's x,y. Pads: shape width x height; smd on the part's side, far side on the other; paste and mask are expansions set on the pad)
ECN-IBMXT [mil]
  oval 50x300 smd: A1(0,0) A2(-100,0) A3(-200,0) A4(-300,0) A5(-400,0) A6(-500,0) A7(-600,0) A8(-700,0) A9(-800,0) A10(-900,0) A11(-1000,0) A12(-1100,0) A13(-1200,0) A14(-1300,0) A15(-1400,0) A16(-1500,0) A17(-1600,0) A18(-1700,0) A19(-1800,0) A20(-1900,0) A21(-2000,0) A22(-2100,0) A23(-2200,0) A24(-2300,0) A25(-2400,0) A26(-2500,0) A27(-2600,0) A28(-2700,0) A29(-2800,0) A30(-2900,0) A31(-3000,0)
  oval 50x300 smd far side: B1(0,0) B2(-100,0) B3(-200,0) B4(-300,0) B5(-400,0) B6(-500,0) B7(-600,0) B8(-700,0) B9(-800,0) B10(-900,0) B11(-1000,0) B12(-1100,0) B13(-1200,0) B14(-1300,0) B15(-1400,0) B16(-1500,0) B17(-1600,0) B18(-1700,0) B19(-1800,0) B20(-1900,0) B21(-2000,0) B22(-2100,0) B23(-2200,0) B24(-2300,0) B25(-2400,0) B26(-2500,0) B27(-2600,0) B28(-2700,0) B29(-2800,0) B30(-2900,0) B31(-3000,0)

## Free pads (board coordinates)
  round 0 hole 32: 1(4925,10200) 4(5075,10200) 5(8125,10200) 8(8275,10200) 9(8875,6300) 12(8725,6300) 13(4575,6300) 16(4425,6300)
  round 0 hole 20: 2(4975,10190) 3(5025,10190) 6(8175,10190) 7(8225,10190) 10(8825,6310) 11(8775,6310) 14(4525,6310) 15(4475,6310)
  round 50 hole 140: 17(9015,6475) 18(9015,9775)
  round 40 / inner round 0 / far side round 40 all layers, no hole: 19(8850,10750) 20(4350,10750)
  round 50 hole 125: 21(9000,10750) 22(4200,10750) 23(4200,6500)

## Nets (pads, with @x,y where several pads share a name; then routed paths per layer and width w, separated by ;. In a path a pad name is that pad's centre, name@x,y a point inside that pad or via, vN(x,y) a via of type N, cw(c..) or ccw(c..) an arc to the next point about the centre after c; other vN are vias at no path point)
pads on no net: P1.A1 P1.A2 P1.A3 P1.A4 P1.A5 P1.A6 P1.A7 P1.A8 P1.A9 P1.A10 P1.A11 P1.A12 P1.A13 P1.A14 P1.A15 P1.A16 P1.A17 P1.A18 P1.A19 P1.A20 P1.A21 P1.A22 P1.A23 P1.A24 P1.A25 P1.A26 P1.A27 P1.A28 P1.A29 P1.A30 P1.A31 P1.B1 P1.B2 P1.B3 P1.B4 P1.B5 P1.B6 P1.B7 P1.B8 P1.B9 P1.B10 P1.B11 P1.B12 P1.B13 P1.B14 P1.B15 P1.B16 P1.B17 P1.B18 P1.B19 P1.B20 P1.B21 P1.B22 P1.B23 P1.B24 P1.B25 P1.B26 P1.B27 P1.B28 P1.B29 P1.B30 P1.B31

## Keep-outs
KeepOutLayer:
  lines w8: 4055,6600 4305,6600 4305,6350 5155,6350 5155,5950 8255,5950 8255,6350 8880,6350 8880,6600 9155,6600 9155,9650 8880,9650 8880,9900 9155,9900 9155,10150 4055,10150 4055,6600

## Other copper
TopLayer:
  text ".GTL" at 8905,11100 h90
MidLayer1:
  text ".G1" at 8905,11100 h90
MidLayer2:
  text ".G2" at 8905,11100 h90
MidLayer3:
  text ".G3" at 8905,11100 h90
MidLayer4:
  text ".G4" at 8905,11100 h90
MidLayer5:
  text ".G5" at 8905,11100 h90
MidLayer6:
  text ".G6" at 8905,11100 h90
MidLayer7:
  text ".G7" at 8905,11100 h90
MidLayer8:
  text ".G8" at 8905,11100 h90
BottomLayer:
  text "P/N XXXXXX-XXX REV A" at 5320,11150 h75
  text ".GBL" at 8905,11100 h90

## Silkscreen, mask and mechanical layers (free items; w line width, h text height)
TopOverlay:
  rectangle: 4281,11353 5031,11553
  rectangle: 4281,11643 5031,11843
  lines w10: 5392.59,11745.97 ccw(c5441,11785.5) 5392.71,11745.83
  text "C" at 5496,11748 h60
  text "2002 COMPANY NAME" at 5646,11748 h75
  text "S/N" at 4031,11700.5 h75
  text "BOARD NAME" at 5496,11573 h75
  text "ASSY NO.: XXXXXX" at 5496,11423 h75
  text "REV" at 4031,11403 h75
  text ".GTO" at 8905,11100 h90
TopPaste:
  text ".GTP" at 8905,11100 h90
BottomPaste:
  text ".GBP" at 8905,11100 h90
TopSolder:
  rectangle: 5080,5950 8330,6325
  text ".GTS" at 8905,11100 h90
BottomSolder:
  rectangle: 5080,5950 8330,6325
  text ".GBS" at 8905,11100 h90
Mechanical1:
  lines w20: 4000,6000 5048,6000 5048,6238 4595,6238 4595,6300 5085,6300 5110,6275 5110,6050 5160,6000 8250,6000 8300,6050 8300,6275 8325,6300 8705,6300 8705,6238 8362,6238 8362,6000 9200,6000 9200,6238 8895,6238 8895,6300 9200,6300 9200,10200 8295,10200 8295,10262 9200,10262 9200,10950 4000,10950 4000,10262 4905,10262 4905,10200 4000,10200 4000,6300 4405,6300 4405,6238 4000,6238 4000,6000 ; 5095,10200 8105,10200 8105,10262 5095,10262 5095,10200
Mechanical3:
  lines w10: 8890,6425 8890,6375 8940,6375 ; 8890,6450 8890,6500 ; 8890,6525 8890,6575 8940,6575 ; 8890,9725 8890,9675 8940,9675 ; 8890,9750 8890,9800 ; 8890,9825 8890,9875 8940,9875 ; 8965,6375 9015,6375 ; 8965,6575 9015,6575 ; 8965,9675 9015,9675 ; 8965,9875 9015,9875 ; 9040,6375 9090,6375 ; 9040,6575 9090,6575 ; 9040,9675 9090,9675 ; 9040,9875 9090,9875 ; 9115,6375 9165,6375 ; 9115,6575 9165,6575 ; 9115,9675 9165,9675 ; 9115,9875 9165,9875 ; 9200,6375 9240,6375 9240,5225 9265,5225 9265,9950 9690,9950 9690,9975 9240,9975 9240,9875 9200,9875 ; 9200,6575 9240,6575 9240,9675 9200,9675
Mechanical4:
  circle w10: c5165.68,6020.67 r100
  lines w10: 9870,8415 9945,8340 10020,8415 10095,8340 10170,8415 10245,8340 10320,8415 ; 10351.25,7333.75 10595,7090 10795,7090 ; 11495,8540 12220,8540 ; 12845,7090 12595,7090 12888.75,7383.75 ; 13795,7290 13795,7690 13995,7790 13595,7890 13795,7990 13795,8390 ; 5140,5880 5143.21,5900.36 5193.84,5878.87 5140,5880 ; 5193.68,5878.67 5248.68,5878.67 5243.68,5898.67 5193.68,5878.67 ; 10245,7440 10370,7352.5 10332.5,7315 10245,7440 ; 12870,7402.5 12995,7490 12907.5,7365 12870,7402.5
  lines w20: 9895,8390 9895,7490 9995,7390 10195,7390 10295,7490 10295,8390 ; 12895,8390 12895,7590 13095,7390 13795,7390
  text ".Pcb_File_Name_No_Path" at 7000,11300 h80
  text ".Printout_Name" at 7005,11100 h90
  text "DETAIL A" at 11495,8590 h120
  text "o" at 11520,7115 h60
  text "o" at 13570,7115 h60
  text ".020 X 45  CHAMFER" at 10870,7040 h90
  text "0.05 X 45  CHAMFER" at 12920,7040 h90
  text "BOTH SIDES" at 10870,6865 h90
  text "TYP 4 PLCS" at 12920,6865 h90
  text "ENTIRE LENGTH OF" at 10870,6690 h90
  text "EDGE CONNECTOR" at 10870,6515 h90
  text "SEE DETAIL A" at 5295,5825 h75
DrillDrawing:
  text ".LEGEND" at 9850,8940 h90
  text "Drilling Details." at 9850,8790 h90

## Dimensions
3975,6500 to 4000,6300 on Mechanical4
4200,5980 to 4000,6000 on Mechanical4

## Text inside footprints (layer, text, board x,y; h text height)
P1: TopOverlay "A31" at 5155,6350 h48; TopOverlay "A1" at 8180,6350 h48; BottomOverlay "B1" at 8230,6350 h48; BottomOverlay "B31" at 5255,6350 h48